# Altium PCB PCB4.PcbDoc
Units mil, origin at the board's own origin, x right, y up, seen from the top; angles counter-clockwise.
Board outline 1235.75 x 1318.58 mil, 4 copper layers (Top Layer, GND, VCC, Bottom Layer), stack 23.756 mil thick; 55 components, 33 nets, 167 pads, 95 vias.
Unrouted connection lines stored in the file: 38.
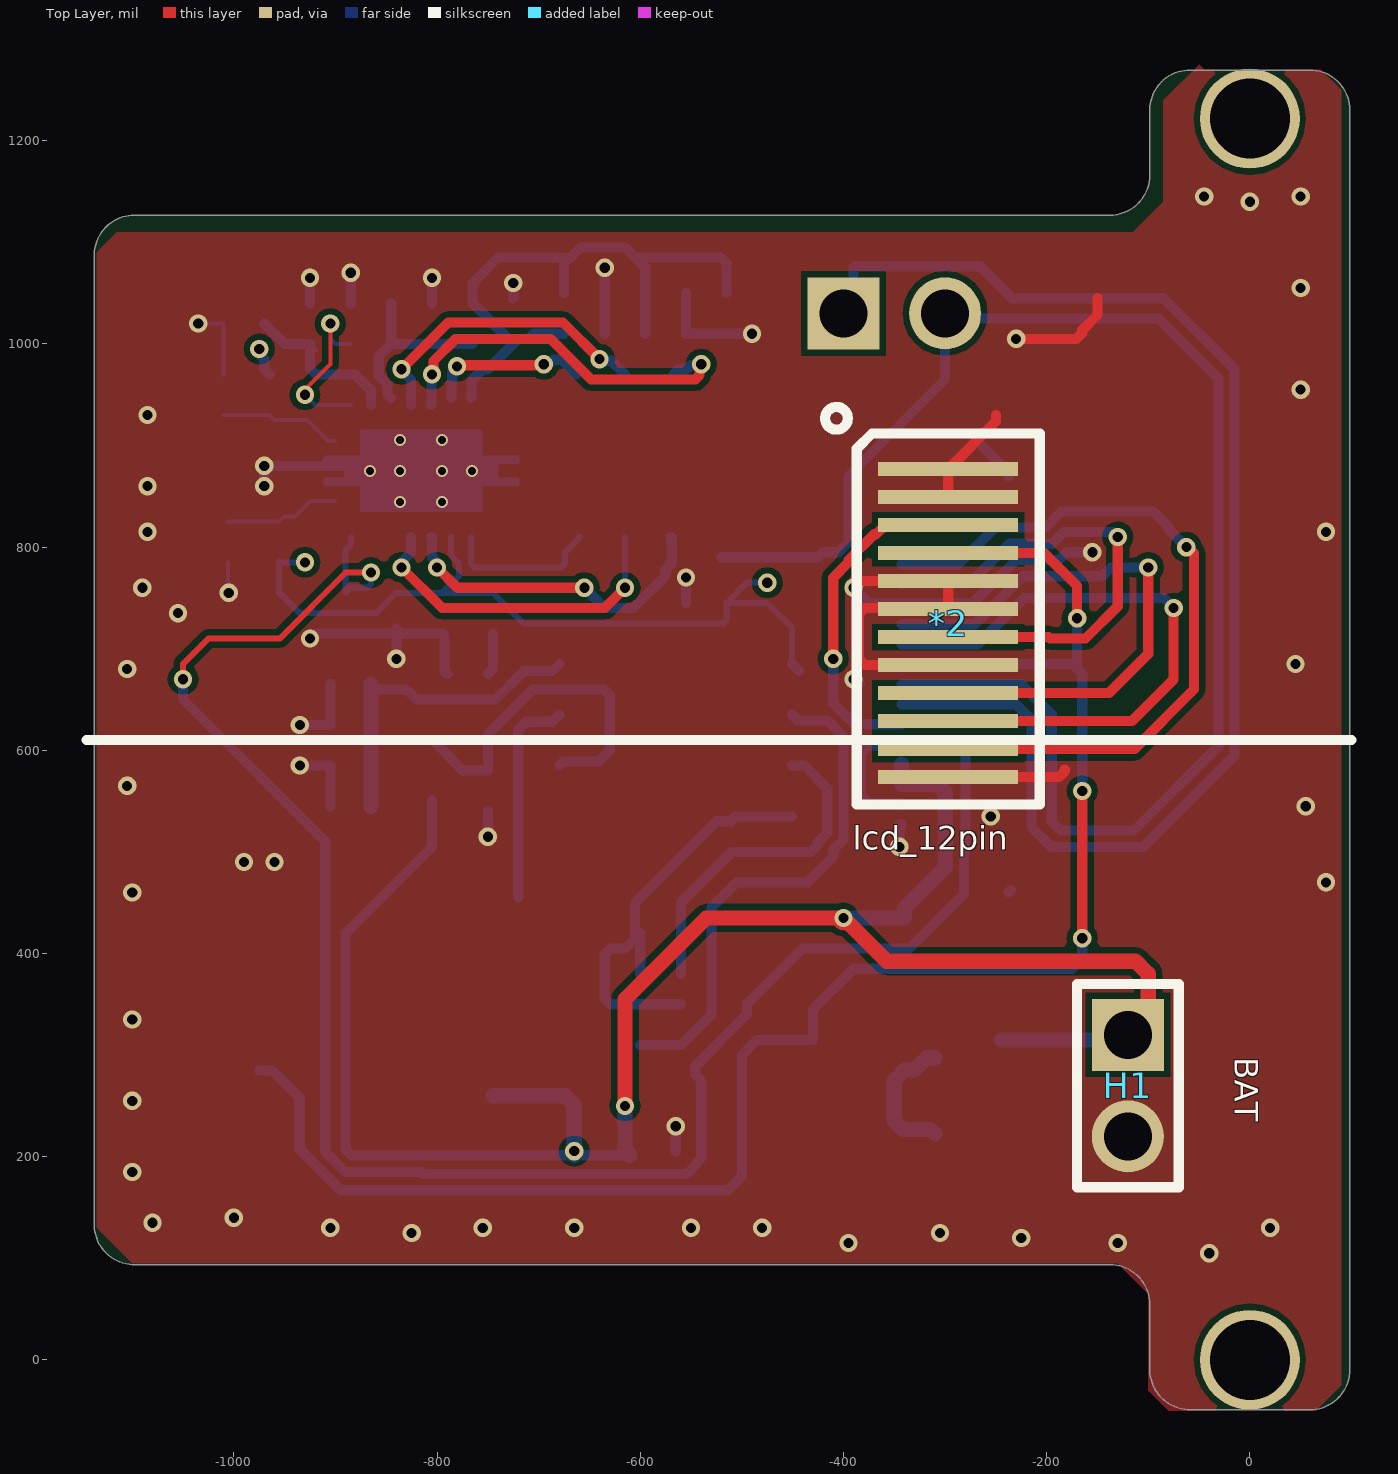
[diagram p0: Top Layer view]
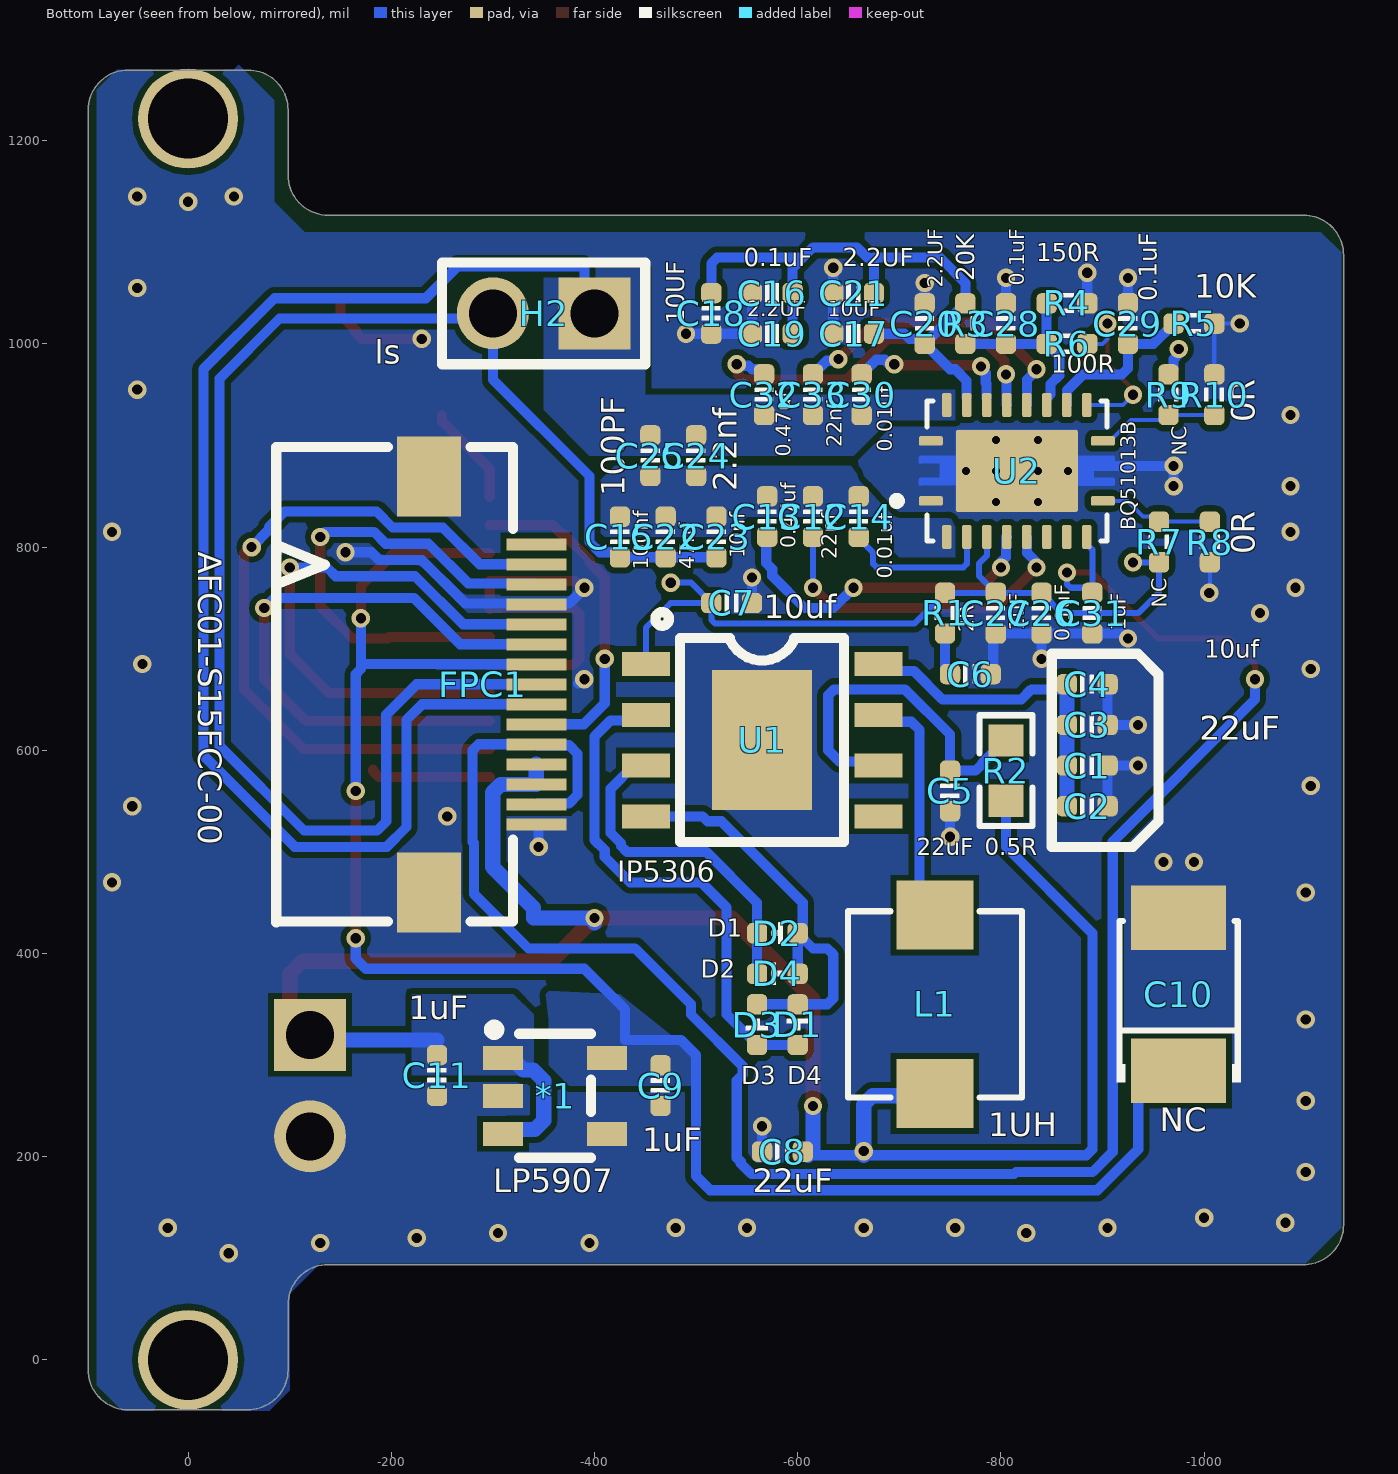
[diagram p1: Bottom Layer view, seen from below]
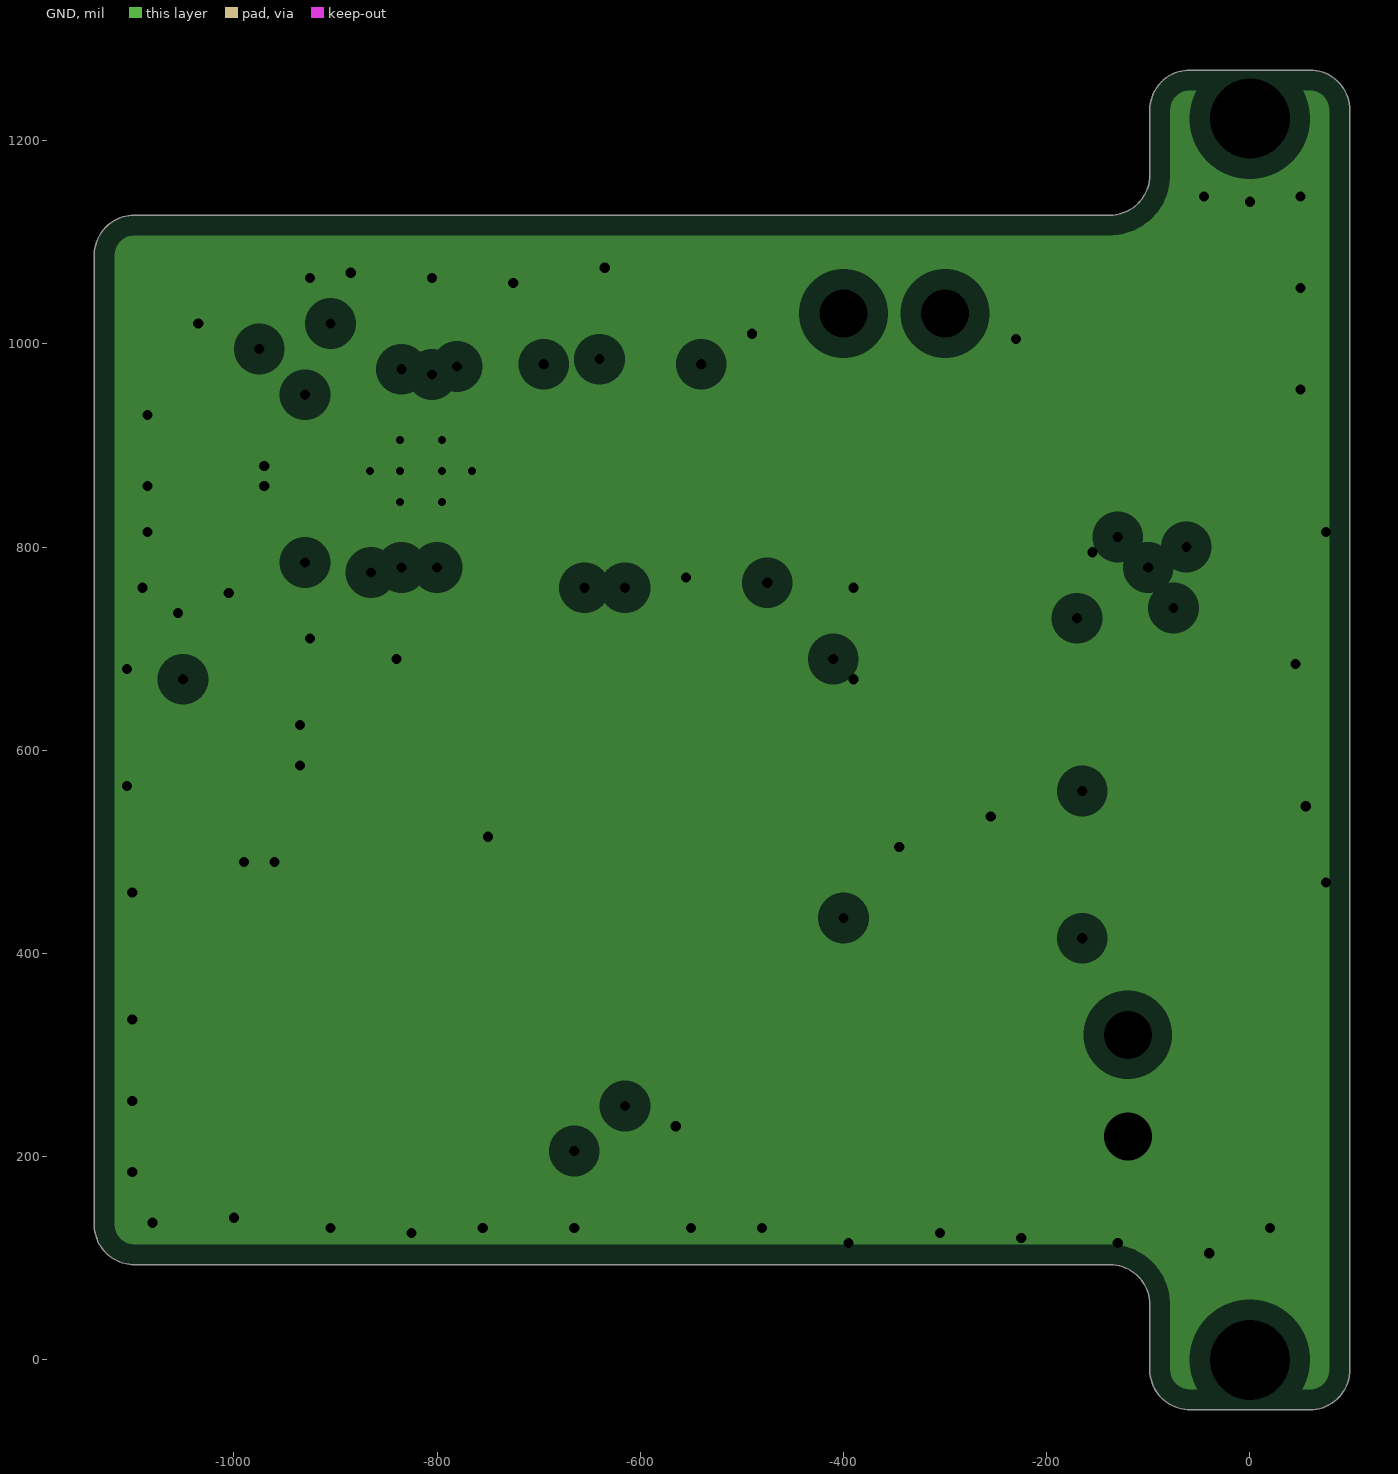
[diagram p2: GND, clearances drawn from the general rule]
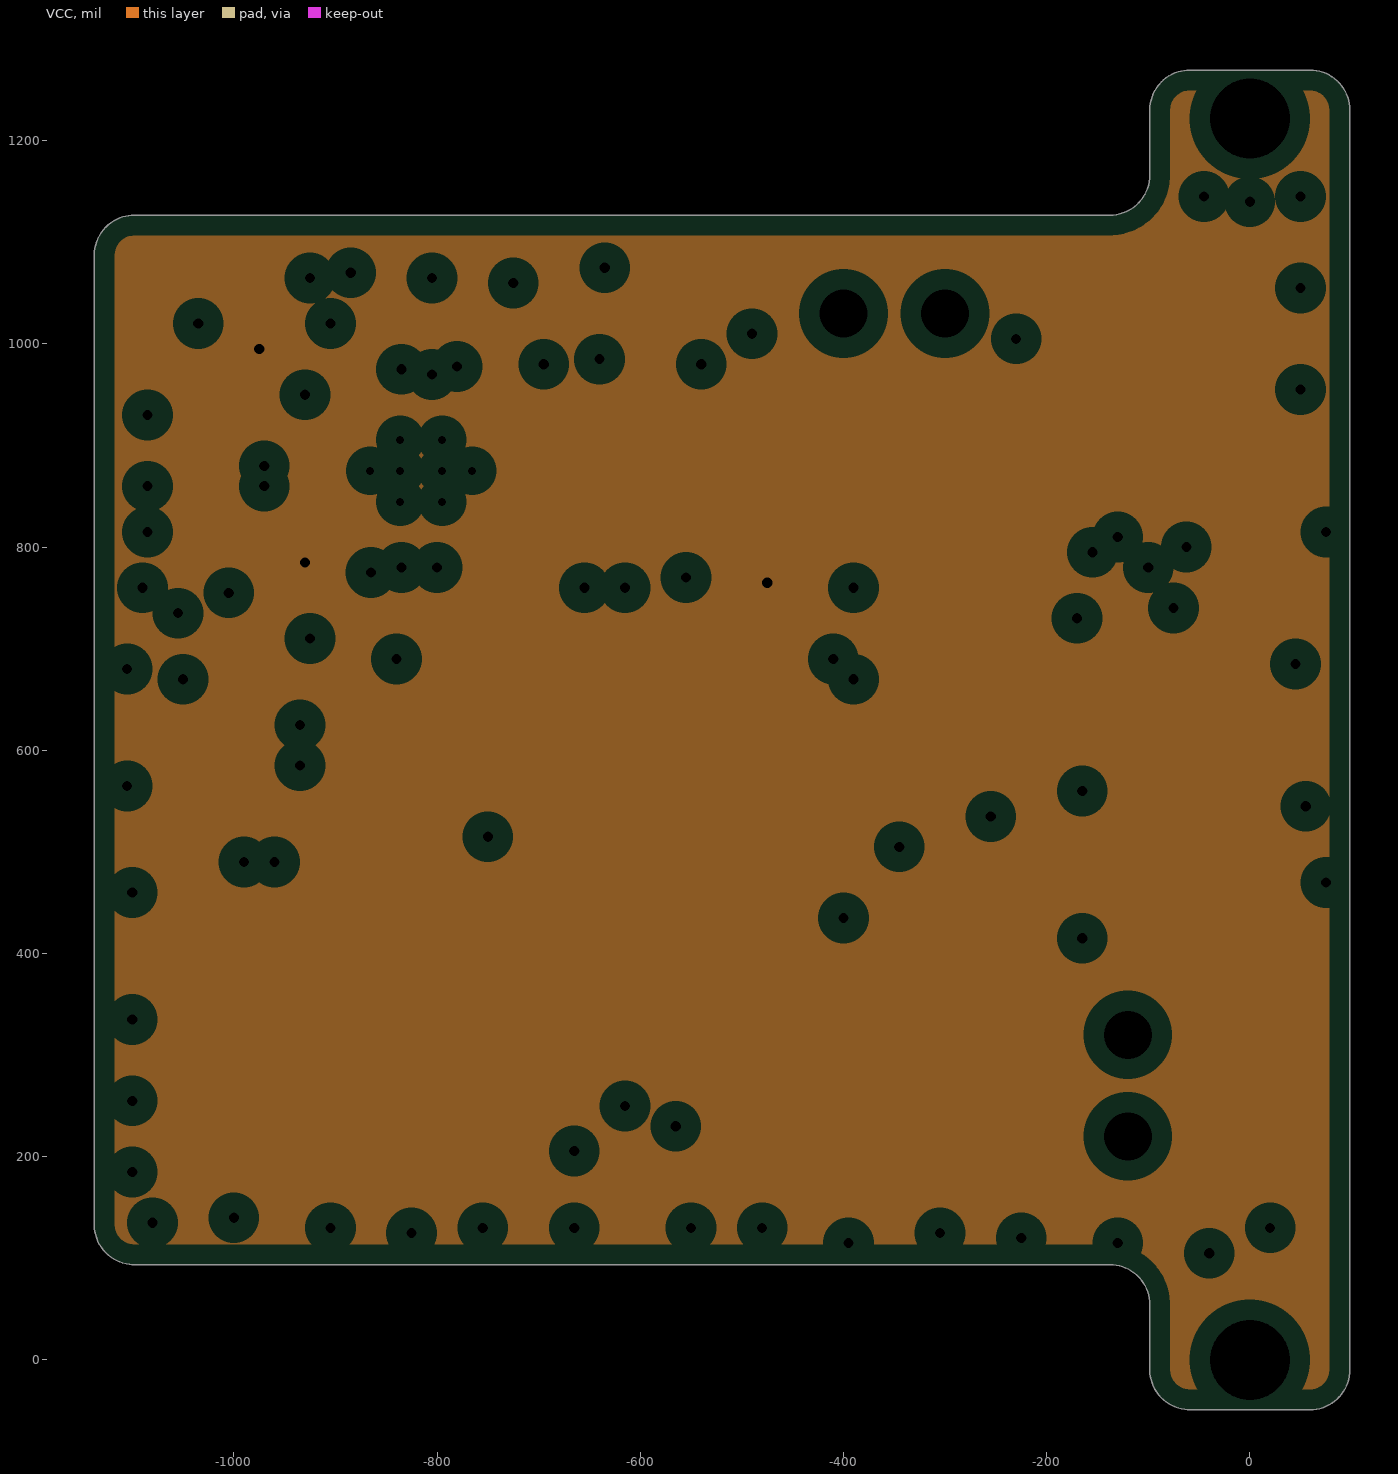
[diagram p3: VCC, clearances drawn from the general rule]
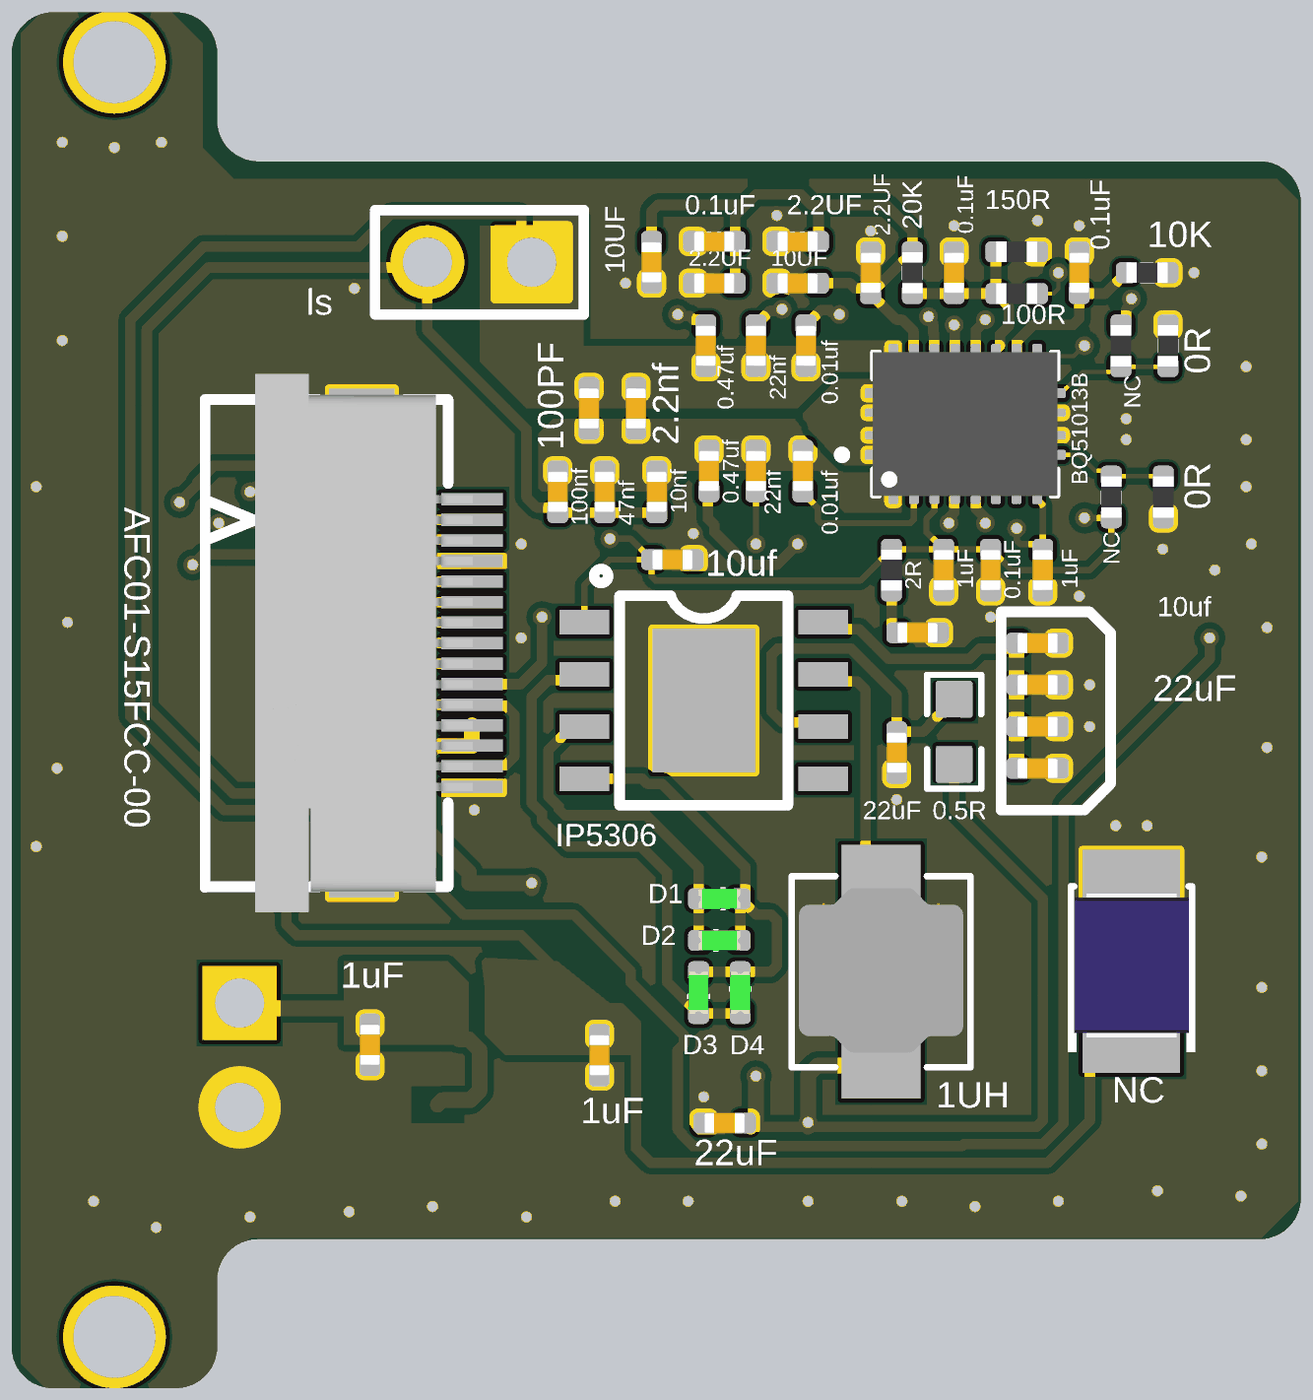
[diagram p4: 3D render of the assembled board from below, using the file's embedded part models]

## Layer stack, top to bottom
Top Solder: solder mask 0.4, Solder Resist, Dk 3.5
Top Layer: signal copper 1.4
Dielectric 2: prepreg 2.8, PP-006, Dk 4.1
GND: plane copper 1.378, net CS
Dielectric 1: dielectric 12.6, FR-4, Dk 4.8
VCC: plane copper 1.378, net OUT
Dielectric 3: prepreg 2.8, PP-006, Dk 4.1
Bottom Layer: signal copper 1.4
Bottom Solder: solder mask 0.4, Solder Resist, Dk 3.5

## Board outline
-1097.95,93.74 -137.8,93.74 cw(c-137.8,54.37) -134.58,93.6 cw(c-137.8,54.37) -98.43,54.37 -98.43,-9.68 ccw(c-59.06,-9.68) -64.1,-48.73 ccw(c-59.06,-9.68) -59.06,-49.06 59.06,-49.06 ccw(c59.06,-9.68) 98.43,-9.68 98.43,1230.16 ccw(c59.06,1230.16) 59.06,1269.53 -59.06,1269.53 ccw(c-59.06,1230.16) -70.45,1267.84 ccw(c-59.06,1230.16) -98.43,1230.16 -98.43,1166.11 cw(c-137.8,1166.11) -127.93,1127.99 cw(c-137.8,1166.11) -137.8,1126.74 -1097.95,1126.74 ccw(c-1097.95,1087.37) -1111.97,1124.16 ccw(c-1097.95,1087.37) -1137.32,1087.37 -1137.32,133.11 ccw(c-1097.95,133.11) -1102.66,94.02 ccw(c-1097.95,133.11)

## Design rules (kind name [scope] priority, off if disabled: settings)
Clearance [All] p1: gap=6 ignorepadtopadclearanceinfootprint=FALSE
HoleToHoleClearance [All] p1: gap=6 allowstackedmicrovias=TRUE
MinimumSolderMaskSliver [All] p1: minsoldermaskwidth=0
PlaneClearance [All] p1: clearance=20
PlaneConnect [All] p1: planeconnectstyle=Direct reliefexpansion=20 reliefentries=4 reliefconductorwidth=10 reliefairgap=10
PolygonConnect [All] p1: connectstyle=Direct reliefconductorwidth=10 reliefentries=4 polygonreliefangle="90 Angle" airgapwidth=10
RoutingVias [All] p1: holewidth=10 width=18 viastyle="Through Hole" minholewidth=10 minwidth=18 maxholewidth=28 maxwidth=50
SilkToSilkClearance [All] p1: silktosilkclearance=6
SilkToSolderMaskClearance [IsPad] p1: minsilkscreentomaskgap=0 clearancetoexposedcopper=TRUE
SolderMaskExpansion [All] p1: expansion=4 istentingtop=FALSE
Width [All] p1: maxlimit=30 minlimit=4 preferedwidth=4
24 further rules are at their usual default settings.

## Components (designator, comment, footprint, x,y, rotation, side; value= is the part's Value field where it differs from the comment)
*1 "LP5907" LP5907MFX-3.3V -48826.49,48722.39 r0 bottom
*2 "lcd_12pin" 1.3‘240x240__ips -296.85,876.77 r0 top locked
C1 "22uF" CAP_0402 -885,585 r0 bottom value=0.1u
C2 "22uF" CAP_0402 -885,545 r0 bottom value=0.1u
C3 "22uF" CAP_0402 -885,625 r0 bottom value=0.1u
C4 "22uF" CAP_0402 -885,665 r0 bottom value=0.1u
C5 "22uF" CAP_0402 -750,560 r270 bottom value=0.1u
C6 "10uf" CAP_0402 -770,675 r0 bottom value=0.1u
C7 "10uf" CAP_0402 -535,745 r0 bottom value=0.1u
C8 "22uF" CAP_0402 -585,205 r0 bottom value=0.1u
C9 "1uF" CAP_0402 -465,270 r270 bottom value=0.1u
C10 "NC" CAP-SMD_L3.5-W2.8 -975,360 r270 bottom
C11 "1uF" CAP_0402 -245,280 r90 bottom value=0.1u
C12 "22nf" CAP_0402 -615,830 r270 bottom value=0.1u
C13 "0.47uf" CAP_0402 -570,830 r270 bottom value=0.1u
C14 "0.01uf" CAP_0402 -660,830 r270 bottom value=0.1u
C15 "100nf" CAP_0402 -425,810 r90 bottom value=0.1u
C16 "0.1uF" CAP_0402 -575,1050 r0 bottom value=0.1u
C17 "10UF" CAP_0402 -655,1010 r0 bottom value=0.1u
C18 "10UF" CAP_0402 -515,1030 r270 bottom value=0.1u
C19 "2.2UF" CAP_0402 -575,1010 r0 bottom value=0.1u
C20 "2.2UF" CAP_0402 -725,1020 r90 bottom value=0.1u
C21 "2.2UF" CAP_0402 -655,1050 r0 bottom value=0.1u
C22 "47nf" CAP_0402 -470,810 r90 bottom value=0.1u
C23 "10nf" CAP_0402 -520,810 r90 bottom value=0.1u
C24 "2.2nf" CAP_0402 -500,890 r270 bottom value=0.1u
C25 "100PF" CAP_0402 -455,890 r270 bottom value=0.1u
C26 "0.1uF" CAP_0402 -840,735 r270 bottom value=0.1u
C27 "1uF" CAP_0402 -795,735 r270 bottom value=0.1u
C28 "0.1uF" CAP_0402 -805,1020 r90 bottom value=0.1u
C29 "0.1uF" CAP_0402 -925,1020 r90 bottom value=0.1u
C30 "0.01uf" CAP_0402 -663,950 r90 bottom value=0.1u
C31 "1uF" CAP_0402 -890,735 r270 bottom value=0.1u
C32 "0.47uf" CAP_0402 -567,950 r90 bottom value=0.1u
C33 "22nf" CAP_0402 -615,950 r90 bottom value=0.1u
D1 "D3" LED_0402_GREEN -600,330 r270 bottom value=color?
D2 "D1" LED_0402_GREEN -580,420 r0 bottom value=color?
D3 "D4" LED_0402_GREEN -560,330 r90 bottom value=color?
D4 "D2" LED_0402_GREEN -580,380 r180 bottom value=color?
FPC1 "AFC01-S15FCC-00" FPC-SMD_AFC01-S15FCC-00 -290,665 r270 bottom
H1 "BAT" HDR-TH_2P-P2.54-V -120,270 r270 top
H2 "ls" HDR-TH_2P-P2.54-V -350,1030 r0 bottom
L1 "1UH" IND-SMD_L4.2-W4.2_MS0420-XX -735,350 r90 bottom
R1 "2R" RES_0402 -745,735 r270 bottom value=22R
R2 "0.5R" R0603 -805,580 r90 bottom value=22R
R3 "20K" RES_0402 -765,1020 r270 bottom value=22R
R4 "150R" RES_0402 -865,1040 r180 bottom value=22R
R5 "10K" RES_0402 -990,1020 r180 bottom value=22R
R6 "100R" RES_0402 -865,1000 r0 bottom value=22R
R7 "NC" RES_0402 -955.67,805 r270 bottom value=22R
R8 "0R" RES_0402 -1005.67,805 r270 bottom value=22R
R9 "NC" RES_0402 -965,950 r90 bottom value=22R
R10 "0R" RES_0402 -1010,950 r90 bottom value=22R
U1 "IP5306" ESOP-8_L4.9-W3.9-P1.27-LS6.0-BL-EP -565,610 r270 bottom
U2 "BQ51013B" IC_MSP430FR2522IRHLR -815.67,875 r90 bottom locked

## Footprints (in the part's own frame and the unit in brackets; to place one, negate y for a bottom-side part, rotate by r counter-clockwise, add the part's x,y. Pads: shape width x height; smd on the part's side, far side on the other; paste and mask are expansions set on the pad)
1.3‘240x240__ips [mm]
  rect 3.5x0.35 smd: 1(0,0) 1(0,0) 2(0,-0.7) 3(0,-1.4) 4(0,-2.1) 5(0,-2.8) 6(0,-3.5) 7(0,-4.2) 8(0,-4.9) 9(0,-5.6) 10(0,-6.3) 11(0,-7) 12(0,-7.7)
  silkscreen extent -3.08,-8.38 2.29,1.55
CAP-SMD_L3.5-W2.8 [mil]
  rect 63.29x93.54 smd: 1(75.25,0) 2(-75.25,0)
  silkscreen extent -72,-61 87,61, body extent -65,-55 73,55, height 78
CAP_0402 [mil]
  rrect50% 20x20 smd: 1(-20,0) 2(20,0)
  silkscreen extent -6,-9 6,9, body extent -20,-10 20,10, height 20
ESOP-8_L4.9-W3.9-P1.27-LS6.0-BL-EP [mm]
  rect 0.6x1.2 smd: 1(-1.905,-2.908) 2(-0.635,-2.908) 3(0.635,-2.908) 4(1.905,-2.908) 5(1.905,2.908) 6(0.635,2.908) 7(-0.635,2.908) 8(-1.905,2.908)
  rect 3.5x2.5 smd: 9(0,0)
  silkscreen extent -3.2,-2.67 2.55,2.05
FPC-SMD_AFC01-S15FCC-00 [mm]
  rect 0.3x1.5 smd: 1(-3.5,1.34) 2(-3,1.34) 3(-2.5,1.34) 4(-2,1.34) 5(-1.5,1.34) 6(-1,1.34) 7(-0.5,1.34) 8(0,1.34) 9(0.5,1.34) 10(1,1.34) 11(1.5,1.34) 12(2,1.34) 13(2.5,1.34) 14(3,1.34) 15(3.5,1.34)
  rect 2x1.6 smd: 16(-5.2,-1.341) 17(5.2,-1.341)
  silkscreen extent -5.93,-5.16 5.95,0.76, body extent -6.55,-3.94 6.55,1.36, height 2
HDR-TH_2P-P2.54-V [mm]
  rect 1.8x1.8 hole 1.2: 1(-1.27,0)
  round 1.8 hole 1.2: 2(1.27,0)
  silkscreen extent -2.54,-1.27 2.54,1.27
IC_MSP430FR2522IRHLR [mm]
  rrect42% 0.24x0.6 smd: 1(-0.75,2.15) 10(-0.75,-2.15) 11(0.75,-2.15) 20(0.75,2.15)
  rrect42% 0.6x0.24 smd: 2(-1.65,1.75) 3(-1.65,1.25) 4(-1.65,0.75) 5(-1.65,0.25) 6(-1.65,-0.25) 7(-1.65,-0.75) 8(-1.65,-1.25) 9(-1.65,-1.75) 12(1.65,-1.75) 13(1.65,-1.25) 14(1.65,-0.75) 15(1.65,-0.25) 16(1.65,0.25) 17(1.65,0.75) 18(1.65,1.25) 19(1.65,1.75)
  rrect5% 2.05x3.05 smd paste-3: 21(0,0)
  Top Layer region: 381 vertices and 0 holes, not listed, extent -1.025,-2.45 1.025,2.45
  silkscreen extent -1.75,-2.25 1.75,3.1, body extent -1.75,-2.25 1.75,2.25, height 1
IND-SMD_L4.2-W4.2_MS0420-XX [mm]
  rect 1.724x1.92 smd: 1(2.228,0) 2(-2.228,0)
  silkscreen extent -2.33,-2.18 2.33,2.18, body extent -1.97,-2 2.03,2, height 1
LED_0402_GREEN [mil]
  rrect50% 20x20 smd: 1(-20,0) 2(20,0)
  silkscreen extent -6,-10 6,11, body extent -20,-10 20,10, height 18
LP5907MFX-3.3V [mm]
  rect 1x0.6 smd: 1(1232.319,1229.995) 2(1232.319,1230.945) 3(1232.319,1231.895) 4(1229.719,1231.895) 5(1229.719,1229.995)
  silkscreen extent 1230.12,1229.17 1232.67,1232.49
R0603 [mil]
  rect 31.75x34.02 smd: 1(-29.66,0) 2(29.66,0)
  silkscreen extent -55,-26 55,26
RES_0402 [mil]
  rrect50% 20x20 smd: 1(-20,0) 2(20,0)
  silkscreen extent -7,-10 7,10, body extent -20,-10 20,10, height 14

## Part data
*1: library part LP5907MFX-3.3V
C1 C2 C3 C4 C5 C6 C7 C8 C9 C11 C12 C13 C14 C15 C16 C17 C18 C19 C20 C21 C22 C23 C24 C25 C26 C27 C28 C29 C30 C31 C32 C33: library part 电容-0402, "Capacitor"
C10: library part 3528-钽电容, BOM_JLCPCB Part Class="Extended Part", BOM_Manufacturer="Hunan Xiangyee in S&T", BOM_Manufacturer Part=CA45-B016M476T, BOM_Supplier=LCSC, BOM_Supplier Part=C435294, Contributor=LCSC, nameAlias=Capacitance, spicePre=C, spiceSymbolName=CA45-B016M476T
D1 D2 D3 D4: library part LED灯_0402, "LED", Type=0402
FPC1: library part FPC-15P-0.5-AFC01-S15FCC-00, BOM_JLCPCB Part Class="Extended Part", BOM_Manufacturer=JUSHUO, BOM_Manufacturer Part=AFC01-S15FCC-00, BOM_Supplier=LCSC, BOM_Supplier Part=C262271, Contributor=LCSC, spicePre=F, spiceSymbolName=AFC01-S15FCC-00
H1 H2: library part 排针-1*2, BOM_JLCPCB Part Class="Extended Part", BOM_Manufacturer="TE Connectivity", BOM_Manufacturer Part=826629-2, BOM_Supplier=LCSC, BOM_Supplier Part=C86471, spicePre=H, spiceSymbolName=Header-Male-2.54_1x2
L1: library part 电感-0420, "电感-0420", BOM_JLCPCB Part Class="Extended Part", BOM_Manufacturer=COILMX, BOM_Manufacturer Part=MS0420-100M, BOM_Supplier=LCSC, BOM_Supplier Part=C380158, Contributor=LCSC, nameAlias=Inductance, spicePre=L, spiceSymbolName=MS0420-100M
R1 R3 R4 R5 R6 R7 R8 R9 R10: library part 电阻-0402, "Resistor"
R2: library part 电阻-0603, "Resistor"
U1: "充电宝芯片_支持边充边放", BOM_JLCPCB Part Class="Extended Part", BOM_Manufacturer=INJOINIC, BOM_Manufacturer Part=IP5306, BOM_Supplier=LCSC, BOM_Supplier Part=C181692, Contributor=LCSC, spicePre=U, spiceSymbolName=IP5306
U2: "无线充电接受，qi"

## Free pads (board coordinates)
  round 98.43 hole 78.74: ""(0,0) ""(0,1221.78)

## Via types
v1: diameter 18, hole 10, Top Layer to Bottom Layer, tented both sides, 87 vias
v2: diameter 11.81, hole 7.87, Top Layer to Bottom Layer, tented both sides, 8 vias

## Nets (pads, with @x,y where several pads share a name; then routed paths per layer and width w, separated by ;. In a path a pad name is that pad's centre, name@x,y a point inside that pad or via, vN(x,y) a via of type N, cw(c..) or ccw(c..) an arc to the next point about the centre after c; other vN are vias at no path point)
AC1: C12.1 C13.1 C14.1 C15.2 C22.2 C23.2 C24.2 C25.2 U2.2
AC2: C24.1 C25.1 C30.1 C32.1 C33.1 FPC1.9 H2.1 U2.19 | length 1331.7
  Bottom Layer w10: H2.1 -390,1040 -390,1075 -388.57,1076.43 -265.33,1076.43 -233.9,1045 -85,1045 -15,975 -15,595 -105,505 -195.51,505 -215,524.49 -215,630 -230.31,645.31 FPC1.9
AD: C31.1 FPC1.11 FPC1.14 U2.9 | length 2014.1
  Top Layer w6: v1(-1050,670) -1050,685 -1025,710 -955,710 -890,775 v1(-865,775)
  Bottom Layer w6: U2.9 -884.57,802.95 -890,797.52 C31.1 -885,760 -868.51,760 -865,763.51 v1(-865,775)
  Bottom Layer w10: v1(-1050,670) -1050,650 -910,510 -910,204.73 -890.27,185 -815,185 -813,183 -554.37,183 -544,193.37 -544,195 -540,199 -540,275 -545.86,280.86 -545.86,289.14 -495,340 -495,350 -440,405 -335,405 -281.24,458.76 -281.24,508.76 -280,510 -280,600.08 -285.86,605.94 FPC1.11 -343.68,605.03 -374.98,605.03 -383.3,596.71 -383.3,556.11 -374.98,547.79 -343.68,547.79 FPC1.14
AD_E: U2.8
BAT: *1.1 *1.3 C8.1 C11.2 FPC1.12 FPC1.13 H1.1 L1.2 R2.1 | length 2087.8
  Top Layer w15: v1(-615,250) -615,355 -535,435 -405.81,435 -401.39,430.57 -400.81,430.57 v1@-400,431.39 ; v1(-400,435) -357.5,392.5 -112.5,392.5 -100,380 H1.1@-100,345
  Bottom Layer w10: R2.1 -805,505 -890,420 -890,207.36 -884.14,201.5 v1@-665,201.5 ; v1(-665,205.5) v1@-665,201.5 ; C8.1@-610,201.5 v1@-665,201.5
  Bottom Layer w15: L1.2@-745,260 -673.79,260 -665,251.21 v1@-665,201.5 ; v1(-615,250) -615,206.5 C8.1@-610,201.5 ; v1@-400,430 v1(-400,435) -340,435 -340,445 -299.74,485.26 -299.74,558.38 -307.65,566.29 -342.49,566.29 FPC1.13 FPC1.12 ; *1.3 -314.31,226.91 -341.21,226.91 -350,235.7 -350,275 -339.69,285.31 -329.97,285.31 -317.88,297.4 *1.1 ; -245,315 -147.93,315 -132.5,330.43 H1.1@-132.5,332.5
BOOT1: C14.2 U2.3 | length 154
  Bottom Layer w6: U2.3 -766.46,783.51 -762.94,780 -677.77,780 -674.25,783.51 -674.25,794.67 -660,808.92 C14.2
BOOT2: C30.2 U2.17 | length 159.4
  Top Layer w10: v1(-780.38,977.9) -779.33,978.95 -696.05,978.95 v1(-695,980)
  Bottom Layer w10: U2.17@-785.87,946.77 -785.87,960.85 -785,961.72 -785,971.12 -780.38,975.74 v1(-780.38,977.9) ; v1(-695,980) -693.47,981.53 -688.47,981.53 -685.64,984.36 -677.36,984.36 C30.2
CIOL1: C15.1 C22.1 C23.1 FPC1.8 H2.2 | length 1520.4
  Bottom Layer w10: C23.1 C22.1 C15.1 -420,795 -405,795 -395,805 -395,870 -300,965 -300,1025 H2.2 -295,1025 -90,1025 -31,966 -31,604 -114,521 -186,521 -195,530 -195,635 -224.99,664.99 FPC1.8
CLMP1: C13.2 U2.5 | length 328.8
  Top Layer w10: v1(-800,780) -780,760 v1(-655,760)
  Bottom Layer w10: U2.5 U2.5 -805,810 -805,790 -800,785 v1(-800,780) ; v1(-655,760) -635,740 -606.72,740 -575,771.72 -575,778.28 -569,784.28 -569,809 C13.2
CLMP2: C32.2 U2.16 | length 375.9
  Top Layer w10: v1(-805,970) -803.47,971.53 -803.47,983.1 -781.57,1005 -688.28,1005 -648.28,965 -545.86,965 -541.53,969.33 -541.53,978.47 v1(-540,980)
  Bottom Layer w10: U2.16 -805.55,940.24 -805.55,969.45 v1(-805,970) ; C32.2 -562,975 -555,975 -551.53,978.47 -541.53,978.47 v1(-540,980)
COM1: C12.2 U2.6 | length 328.8
  Top Layer w10: v1(-835,780) -795,740 -635,740 v1(-615,760)
  Bottom Layer w6: v1(-615,760) C12.2
  Bottom Layer w10: v1(-835,780) -835,785 -825.79,794.21 -825.79,809.76 U2.6
COM2: C33.2 U2.15 | length 299.1
  Top Layer w10: v1(-835,975) -789,1021 -676,1021 v1(-640,985)
  Bottom Layer w10: v1(-835,975) -835,974.2 -825.79,964.99 -825.79,940.24 U2.15 ; v1(-640,985) -638.47,983.47 -628.47,983.47 C33.2
CS: *1.2 *1.4 *2.1 *2.2 *2.5 *2.6 *2.8 *2.12 C1.1 C2.1 C3.1 C4.1 C5.2 C6.1 C7.1 C8.2 C9.2 C10.2 C11.1 C16.2 C17.2 C18.2 C19.2 C20.2 C21.2 C26.2 C27.2 C28.2 C29.2 C31.2 FPC1.4 FPC1.15 FPC1.16 FPC1.17 H1.2 R4.2 R5.2 R8.2 R10.2 U1.9 U2.1 U2.20 U2.21 | length 1943.1
  Top Layer w10: v1(-390,760) -387.84,760 -381.3,766.54 *2.5 *2.6 -297.87,740 -379.14,740 -385,734.14 -385,690 -378.86,683.86 *2.8 ; *2.12 -187.96,573.62 -182.1,579.48 -182.1,581.18 ; *2.2 -296.85,876.77 -250,923.62 -250,930 ; v1(-230,1005) -170.86,1005 -165,1010.86 -165,1013.53 -150,1028.53 -150,1045
  Bottom Layer w4: v1(-1035,1020) R5.2 R10.2 ; R8.2 -1005.67,760.67 -1005,760 v1(-1005,755)
  Bottom Layer w10: v1(-970,860) v1(-970,880) -870.87,880 v2(-865.87,875) ; v1(-935,585) C1.1 C2.1 ; v1(-935,625) C3.1 C4.1 ; v1(-925,710) -920,715 C31.2 C26.2 C27.2 -792.5,712.5 -792.5,677.5 C6.1 ; C29.2 v1(-925,1065) ; R4.2 v1(-885,1070) ; v1(-840,690) C26.2@-840,720 ; C28.2 v1(-805,1065) ; v1(-750,515) C5.2 ; C20.2@-725,1045 v1(-725,1060) ; C17.2 C21.2 v1(-635,1075) ; C8.2 v1(-565,230) ; C7.1 v1(-555,770) ; C16.2 C19.2 C18.2 v1(-490,1010) ; v1(-390,670) -387.84,670 v1@-383.73,665.9 ; v1(-390,760) -390,759.66 -374.98,744.64 -343.68,744.64 FPC1.4 -341.87,744.64 -272.73,744.64 -230.02,787.35 -187.91,787.35 -180.27,795 v1(-155,795) ; v1(-345,505) -345,526.29 -344.09,527.2 FPC1.15 ; FPC1.16@-263.72,900 -237.22,873.5 FPC1.16 ; FPC1.17 FPC1.17@-235,462.51 ; H1.2@-128.47,211.53 H1.2
  other v1: -40,105 -395,115 -130,115 -225,120 -825,125 -305,125 -905,130 -755,130 -665,130 -550,130 -480,130 20,130 -1080,135 -1000,140 -1100,185 -1100,255 -1100,335 -1100,460 75,470 -990,490 -960,490 -255,535 55,545 -1105,565 -1105,680 45,685 -1055,735 -1090,760 -1085,815 75,815 -1085,860 -1085,930 50,955 50,1055 0,1140 -45,1145 50,1145
  other v2: -836.34,844.49 -795,844.49 -836.34,875 -795,875 -765.47,875 -836.34,905.51 -795,905.51
D/C: *2.7 FPC1.3 | length 485.1
  Top Layer w10: *2.7 -198.04,711.42 -196.63,710 -161.72,710 -130,741.72 v1(-130,810)
  Bottom Layer w10: FPC1.3 -341.87,764.32 -275.68,764.32 -236.65,803.35 -194.54,803.35 -182.89,815 -135,815 v1(-130,810)
FOD: C28.1 R3.2 R4.1 R6.2 U2.14 | length 183.3
  Bottom Layer w10: U2.14@-845.47,946.77 -848.88,950.18 -848.88,960.6 -857.41,969.13 -857.41,987.59 R6.2 ; R4.1 R6.2 ; R3.2 C28.1 R6.2
LCD_RESET: *2.11 FPC1.2 | length 728
  Top Layer w10: *2.11 -113.82,601.18 -55,660 -55,794.14 -60.86,800 v1(-62.5,800)
  Bottom Layer w10: FPC1.2 -286.9,783.1 -250.65,819.35 -201.17,819.35 -185.52,835 -95,835 -79.52,819.52 -79.52,817.02 v1(-62.5,800)
LEDA: *2.3 FPC1.10 | length 337.6
  Top Layer w10: v1(-410,690) -410,770 -395,785 -395,787.29 -369.68,812.61 -367.9,812.61 -358.86,821.65 *2.3
  Bottom Layer w10: v1@-407.84,690 v1(-410,690) -410,646.2 -389.43,625.62 FPC1.10
MOSI: *2.10 FPC1.6 | length 599.8
  Top Layer w10: *2.10 -116.26,628.74 -75,670 v1(-75,740)
  Bottom Layer w10: FPC1.6 -267.75,704.36 -222.12,750 -85,750 v1(-75,740)
NetC5_1: C5.1 R2.2 U1.6 | length 354
  Bottom Layer w10: R2.2 -803.87,609.66 -782.07,587.86 -782.07,587.07 -775,580 C5.1 -750,615.49 -705.49,660 -635.86,660 -630,654.14 -630,600 -640.88,589.12 -675.38,589.12 U1.6
NetC6_2: C6.2 R1.2 | length 42.1
  Bottom Layer w10: C6.2 -745,680 R1.2
NetC16_1: C16.1 C17.1 C18.1 C19.1 C20.1 C21.1 R3.1 U2.18 | length 615.3
  Bottom Layer w10: U2.18@-766.18,946.77 -766.18,963.82 -755,975 -750,975 C20.1 ; C17.1 -705,1010 -710,1005 -720,1005 C20.1 ; C21.1 -675,1080 -670,1085 -668.28,1085 -658.28,1095 -615,1095 -605,1085 ; -675,1085 -740,1085 -765,1060 R3.1 C20.1 ; C19.1 C16.1 -595,1075 -605,1085 ; C18.1 -515,1079.14 -520.86,1085 -605,1085
NetC29_1: C29.1 R5.1 U2.13 | length 169.1
  Bottom Layer w4: C29.1 C29.1@-919,994
  Bottom Layer w10: R5.1 -950,1000 C29.1 -925,975.86 -919.14,970 -880.91,970 -864.88,953.97 U2.13
NetD1_1: D1.1 D2.1 D3.2 D4.2 U1.4 | length 426.3
  Bottom Layer w10: D2.1@-605,417.71 -605,450 -524.89,530.11 -511.23,530.11 -506.34,535 U1.4 ; D4.2 D2.1 -615,405 -629.14,405 -635,399.14 -635,355.86 -629.14,350 D1.1 D3.2
NetD1_2: D1.2 D3.1 U1.2 | length 510.3
  Bottom Layer w10: D1.2 D3.1 -530,340 -530,445 -505,470 -435,470 -410,495 -410,501.88 -399.88,512.01 -399.88,613.45 -415.86,629.43 -444.93,629.43 U1.2
NetD2_2: D2.2 D4.1 U1.3 | length 331.7
  Bottom Layer w10: D4.1 D2.2 -560,450 -510,500 -431.86,500 -426,505.86 -426,508.51 -415.88,518.63 -415.88,562.19 -438.69,585 U1.3
NetL1_1: L1.1 U1.7 | length 211.7
  Bottom Layer w10: L1.1@-720,455 -720,620 -711.81,628.19 -686.31,628.19 U1.7
NetR6_1: R6.1 U2.12 | length 167
  Top Layer w4: v1(-930,950) -930,955 -905,980 v1(-905,1020)
  Bottom Layer w4: v1(-930,950) -920,940 U2.12 U2.12 ; v1(-905,1020) -905,1005 -900,1000 R6.1
NetR7_1: R7.1 R8.1 U2.10 | length 113.8
  Bottom Layer w4: R8.1 R7.1 -950.34,830.33 -939.67,830.33 -924.53,845.47 U2.10
NetR9_1: R9.1 R10.1 U2.11 | length 120.2
  Bottom Layer w4: R10.1 R9.1 -960,925 -927.87,925 -907.4,904.53 U2.11
OUT: C7.2 C26.1 C27.1 R1.1 R7.2 R9.2 U1.1 U2.4 | length 806.7
  Bottom Layer w6: v1(-930,785) -954.59,785 -955.67,786.08 R7.2 -955.67,755.67 -935.01,735.01 -930.01,735.01 -860,735 C26.1 C27.1 ; U2.4 -786.14,791.6 -778.46,783.91 -778.46,771.54 C27.1 ; v1(-475,765) -495,765 C7.2 ; U1.1 -450.5,720.5 -475,745 C7.2 ; C27.1 R1.1 -715,725 -518.51,725 -515,728.51 C7.2
  Bottom Layer w10: v1(-975,995) -975,990 -970,985 -970,975 R9.2 ; U1.1 U1.1@-443.69,678.19
SCK: *2.9 FPC1.5 | length 563.8
  Top Layer w10: *2.9 -138.7,656.3 -100,695 v1(-100,780)
  Bottom Layer w10: FPC1.5 -270.7,724.05 -223.39,771.35 -145.36,771.35 -136.72,780 v1(-100,780)
VCC3_3V: *1.5 *2.4 C9.1 C10.1 FPC1.7 | length 1752.3
  Top Layer w10: *2.4 -202.38,794.09 -170,761.72 v1(-170,730) ; v1(-165,415) v1(-165,560)
  Bottom Layer w10: C10.1 -961.83,284.75 -935.19,258.11 -935.19,207.29 -894.9,167 -513.86,167 -500,180.86 -500,300 -485,315 -430,315 -430,345 -390,385 -175,385 -165,395 v1(-165,415) ; FPC1.7 -245.31,684.69 -245,685 -170,685 ; v1(-170,730) -170,680 -165,675 v1(-165,560)
VOUT: C1.2 C2.2 C3.2 C4.2 U1.8 | length 326.2
  Bottom Layer w10: C4.2 -860,660 -830,660 -820,650 -742.37,650 -714.18,678.19 -686.31,678.19 U1.8
  Bottom Layer w15: C2.2 C1.2 C3.2 C4.2
pads on no net: FPC1.1 U1.5 U2.7

## Polygon pours and split planes (outlines as drawn)
CS on Bottom Layer "CS_L04_P013" (solid, remove dead copper, pour order 13): -1130,1095 -1115,1110 -115,1110 -85,1140 -85,1240 -50,1275 -45,1270 70,1270 90,1250 90,-25 65,-50 -80,-50 -100,-30 -100,65 -130,95 -1100,95 -1135,130 -1135,1090
AC2 on Bottom Layer "AC2_L04_P004" (solid, pour order 4): -460,935 -450,945 -450,1075 -350,1075 -350,935 -395,890 -460,890
CS on Bottom Layer "CS_L04_P012" (solid, pour order 12): -1015,385 -1010,390 -900,390 -900,500 -910,510 -915,505 -1045,505 -1045,400 -1050,395
VCC3_3V on Bottom Layer "VCC3_3V_L04_P009" (solid, remove dead copper, pour order 9): -500,270 -375,270 -355,290 -355,335 -351.41,363.59 -425,360 -500,300
BAT on Bottom Layer "BAT_L04_P010" (solid, pour order 10): -340,280 -220,280 -220,360 -320,360 -340,340
AC2 on Bottom Layer "AC2_L04_P000" (solid, pour order 0): -755,925 -755,955 -685,955 -680,950 -435,950 -430,945 -430,890 -655,890 -690,925 -745,925
AC1 on Bottom Layer "AC1_L04_P003" (solid, pour order 3): -755,815 -755,820 -750,830 -695,830 -678,847 -652.17,880 -420,880 -405,865 -405,815 -410,810 -530,810 -550,830 -675,830 -695,810 -695,795 -700,790 -755,790
CS on Bottom Layer "CS_L04_P002" (solid, pour order 2): -775,915 -695,915 -665,885 -665,870 -700,835 -770,835 -775,840
CS on Top Layer "CS_L01_P008" (solid, remove dead copper, pour order 8): -1130,1095 -1115,1110 -115,1110 -85,1140 -85,1240 -50,1275 -45,1270 70,1270 90,1250 90,-25 65,-50 -80,-50 -100,-30 -100,65 -130,95 -1100,95 -1135,130 -1135,1090
CS on GND (split plane): 62.83,1249.15 66.47,1248.05 69.81,1246.26 72.75,1243.85 75.16,1240.92 76.94,1237.57 78.05,1233.94 78.37,1230.61 78.33,1230.16 78.33,-9.68 78.37,-10.14 78.05,-13.46 76.94,-17.09 75.16,-20.44 72.75,-23.38 69.81,-25.79 66.47,-27.57 62.83,-28.68 59.51,-29 59.06,-28.96 -59.06,-28.96 -59.51,-29 -61.53,-28.8 -62.83,-28.68 -66.47,-27.57 -69.81,-25.79 -72.75,-23.38 -75.16,-20.44 -76.94,-17.09 -78.05,-13.46 -78.37,-10.14 -78.33,-9.68 -78.33,54.37 -78.34,54.44 -78.71,61.02 -79.82,67.6 -81.67,74.01 -84.22,80.17 -87.45,86 -91.3,91.44 -95.75,96.41 -100.72,100.86 -106.16,104.72 -111.99,107.94 -118.16,110.49 -124.56,112.34 -131.14,113.46 -132.94,113.56 -133.34,113.58 -134.58,113.7 -134.91,113.67 -137.72,113.83 -137.8,113.83 -1097.95,113.83 -1098.41,113.79 -1100.26,113.97 -1101.73,114.12 -1105.36,115.22 -1108.71,117.01 -1111.64,119.41 -1114.05,122.35 -1115.84,125.7 -1116.94,129.33 -1117.27,132.65 -1117.23,133.11 -1117.23,1087.37 -1117.27,1087.82 -1116.94,1091.14 -1115.84,1094.78 -1114.05,1098.12 -1111.64,1101.06 -1108.71,1103.47 -1105.36,1105.26 -1104.83,1105.42 -1101.73,1106.36 -1098.41,1106.68 -1097.95,1106.64 -137.8,1106.64 -137.72,1106.65 -131.14,1107.02 -124.56,1108.13 -124.07,1108.28 -124.01,1108.28 -123.25,1108.51 -122.91,1108.61 -118.16,1109.98 -111.99,1112.53 -106.16,1115.76 -100.72,1119.62 -95.75,1124.06 -91.3,1129.03 -87.45,1134.47 -84.22,1140.31 -81.67,1146.47 -79.82,1152.87 -78.71,1159.45 -78.34,1166.03 -78.33,1166.11 -78.33,1230.16 -78.37,1230.61 -78.05,1233.94 -76.94,1237.57 -75.16,1240.92 -72.75,1243.85 -69.81,1246.26 -66.47,1248.05 -64.63,1248.6 -62.83,1249.15 -59.51,1249.48 -59.06,1249.43 59.06,1249.43 59.51,1249.48
OUT on VCC (split plane): 62.83,1249.15 66.47,1248.05 69.81,1246.26 72.75,1243.85 75.16,1240.92 76.94,1237.57 78.05,1233.94 78.37,1230.61 78.33,1230.16 78.33,-9.68 78.37,-10.14 78.05,-13.46 76.94,-17.09 75.16,-20.44 72.75,-23.38 69.81,-25.79 66.47,-27.57 62.83,-28.68 59.51,-29 59.06,-28.96 -59.06,-28.96 -59.51,-29 -61.53,-28.8 -62.83,-28.68 -66.47,-27.57 -69.81,-25.79 -72.75,-23.38 -75.16,-20.44 -76.94,-17.09 -78.05,-13.46 -78.37,-10.14 -78.33,-9.68 -78.33,54.37 -78.34,54.44 -78.71,61.02 -79.82,67.6 -81.67,74.01 -84.22,80.17 -87.45,86 -91.3,91.44 -95.75,96.41 -100.72,100.86 -106.16,104.72 -111.99,107.94 -118.16,110.49 -124.56,112.34 -131.14,113.46 -132.94,113.56 -133.34,113.58 -134.58,113.7 -134.91,113.67 -137.72,113.83 -137.8,113.83 -1097.95,113.83 -1098.41,113.79 -1100.26,113.97 -1101.73,114.12 -1105.36,115.22 -1108.71,117.01 -1111.64,119.41 -1114.05,122.35 -1115.84,125.7 -1116.94,129.33 -1117.27,132.65 -1117.23,133.11 -1117.23,1087.37 -1117.27,1087.82 -1116.94,1091.14 -1115.84,1094.78 -1114.05,1098.12 -1111.64,1101.06 -1108.71,1103.47 -1105.36,1105.26 -1104.83,1105.42 -1101.73,1106.36 -1098.41,1106.68 -1097.95,1106.64 -137.8,1106.64 -137.72,1106.65 -131.14,1107.02 -124.56,1108.13 -124.07,1108.28 -124.01,1108.28 -123.25,1108.51 -122.91,1108.61 -118.16,1109.98 -111.99,1112.53 -106.16,1115.76 -100.72,1119.62 -95.75,1124.06 -91.3,1129.03 -87.45,1134.47 -84.22,1140.31 -81.67,1146.47 -79.82,1152.87 -78.71,1159.45 -78.34,1166.03 -78.33,1166.11 -78.33,1230.16 -78.37,1230.61 -78.05,1233.94 -76.94,1237.57 -75.16,1240.92 -72.75,1243.85 -69.81,1246.26 -66.47,1248.05 -64.63,1248.6 -62.83,1249.15 -59.51,1249.48 -59.06,1249.43 59.06,1249.43 59.51,1249.48

## Silkscreen, mask and mechanical layers (free items; w line width, h text height)
Top Overlay:
  lines w10: -1145,610.24 100,610.24
Bottom Overlay:
  lines w10: -955,530 -930,505 -850,505 -850,695 -935,695 -955,675 -955,530
Mechanical 1:
  lines w6: -1137.32,133.11 -1137.32,1087.37 ; -1097.95,93.74 -1058.58,93.74 -137.8,93.74 ; -1097.95,1126.74 -137.8,1126.74 ; -98.43,-9.68 -98.43,54.37 ; -98.43,1166.11 -98.43,1230.16 ; -59.06,-49.06 0,-49.06 59.06,-49.06 ; -59.06,1269.53 -12.35,1269.53 12.35,1269.53 59.06,1269.53 ; 98.43,-9.68 98.43,1230.16
  lines w10: -1137.32,133.11 ccw(c-1097.95,133.11) -1102.66,94.02 ccw(c-1097.95,133.11) -1097.95,93.74 ; -1137.32,1087.37 cw(c-1097.95,1087.37) -1111.97,1124.16 cw(c-1097.95,1087.37) -1097.95,1126.74 ; -137.8,93.74 cw(c-137.8,54.37) -134.58,93.6 cw(c-137.8,54.37) -98.43,54.37 ; -137.8,1126.74 ccw(c-137.8,1166.11) -127.93,1127.99 ccw(c-137.8,1166.11) -98.43,1166.11 ; -98.43,-9.68 ccw(c-59.06,-9.68) -64.1,-48.73 ccw(c-59.06,-9.68) -59.06,-49.06 ; -98.43,1230.16 cw(c-59.06,1230.16) -70.45,1267.84 cw(c-59.06,1230.16) -59.06,1269.53 ; 59.06,-49.06 ccw(c59.06,-9.68) 98.43,-9.68 ; 59.06,1269.53 cw(c59.06,1230.16) 98.43,1230.16